# Altium PCB PCB1.PcbDoc
Units mm, origin at the board's own origin, x right, y up, seen from the top; angles counter-clockwise.
Board outline 65.43 x 45.42 mm, 2 copper layers (Top Layer, Bottom Layer); 35 components, 40 nets, 114 pads, 24 vias.
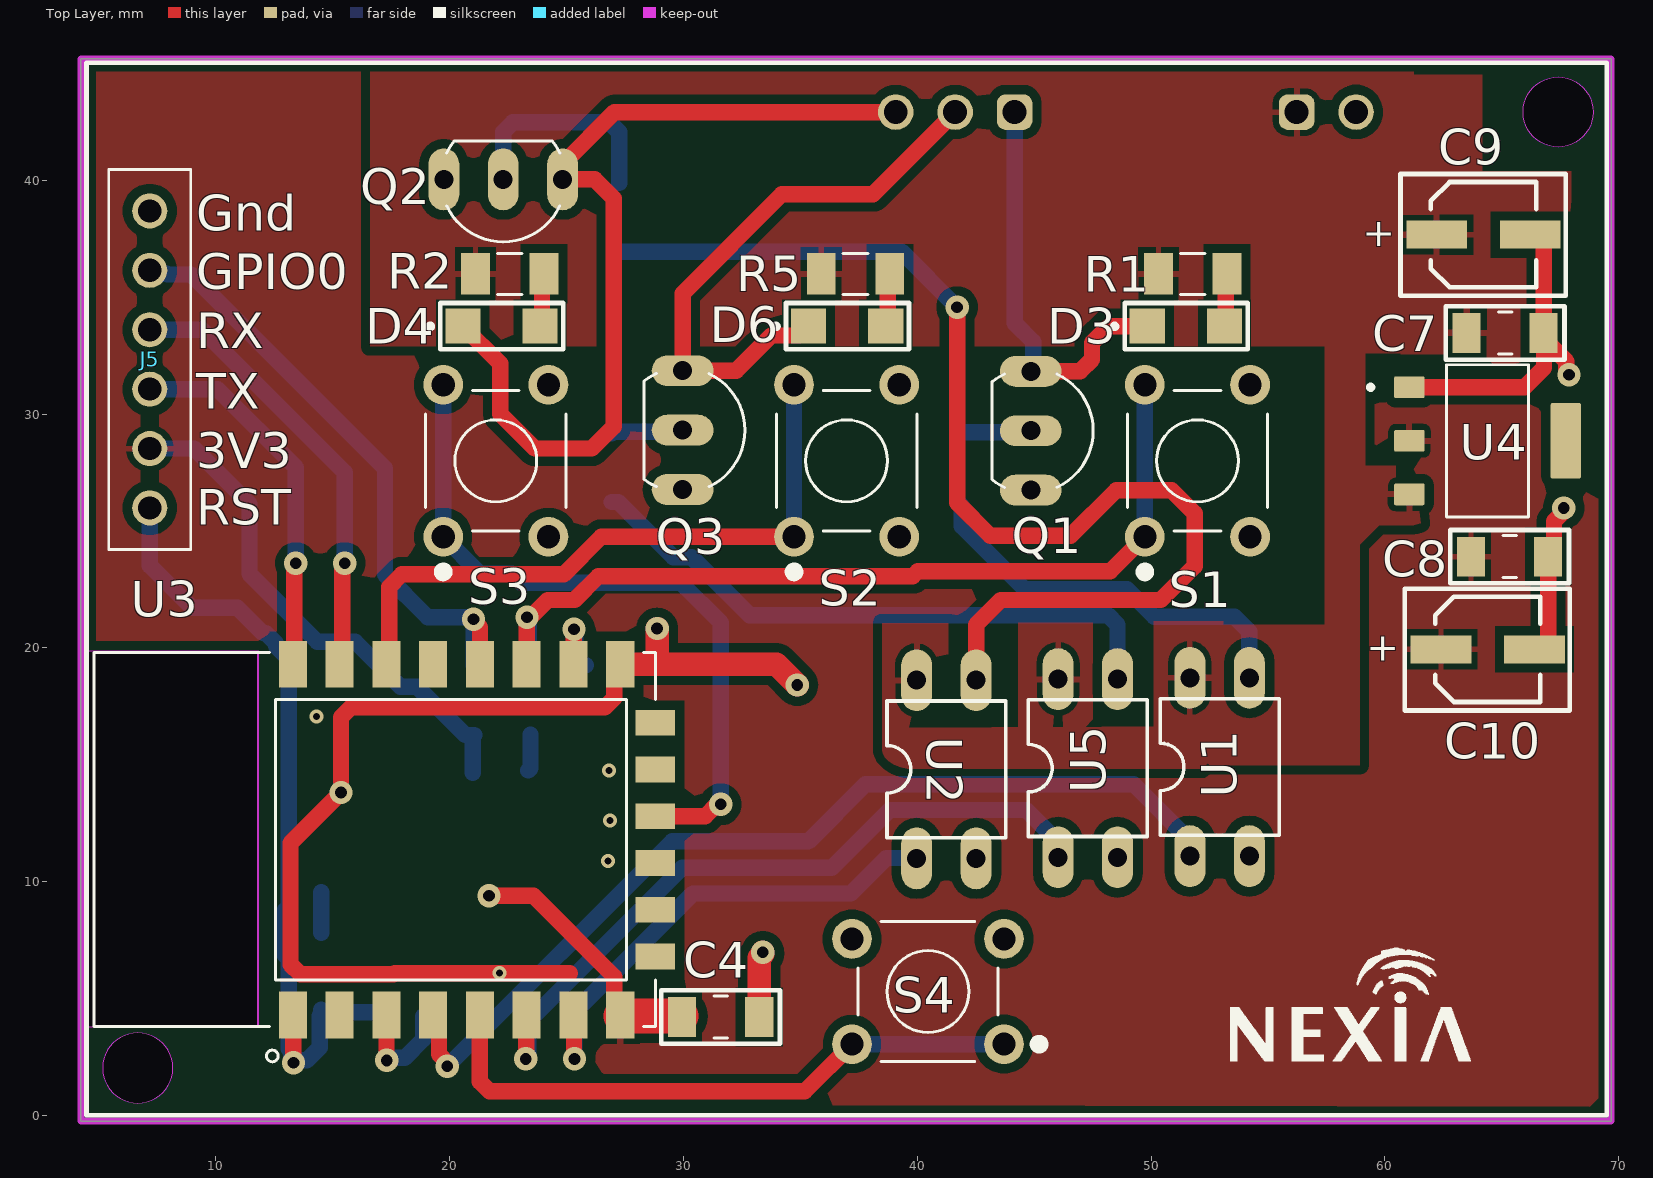
[diagram p0: Top Layer view]
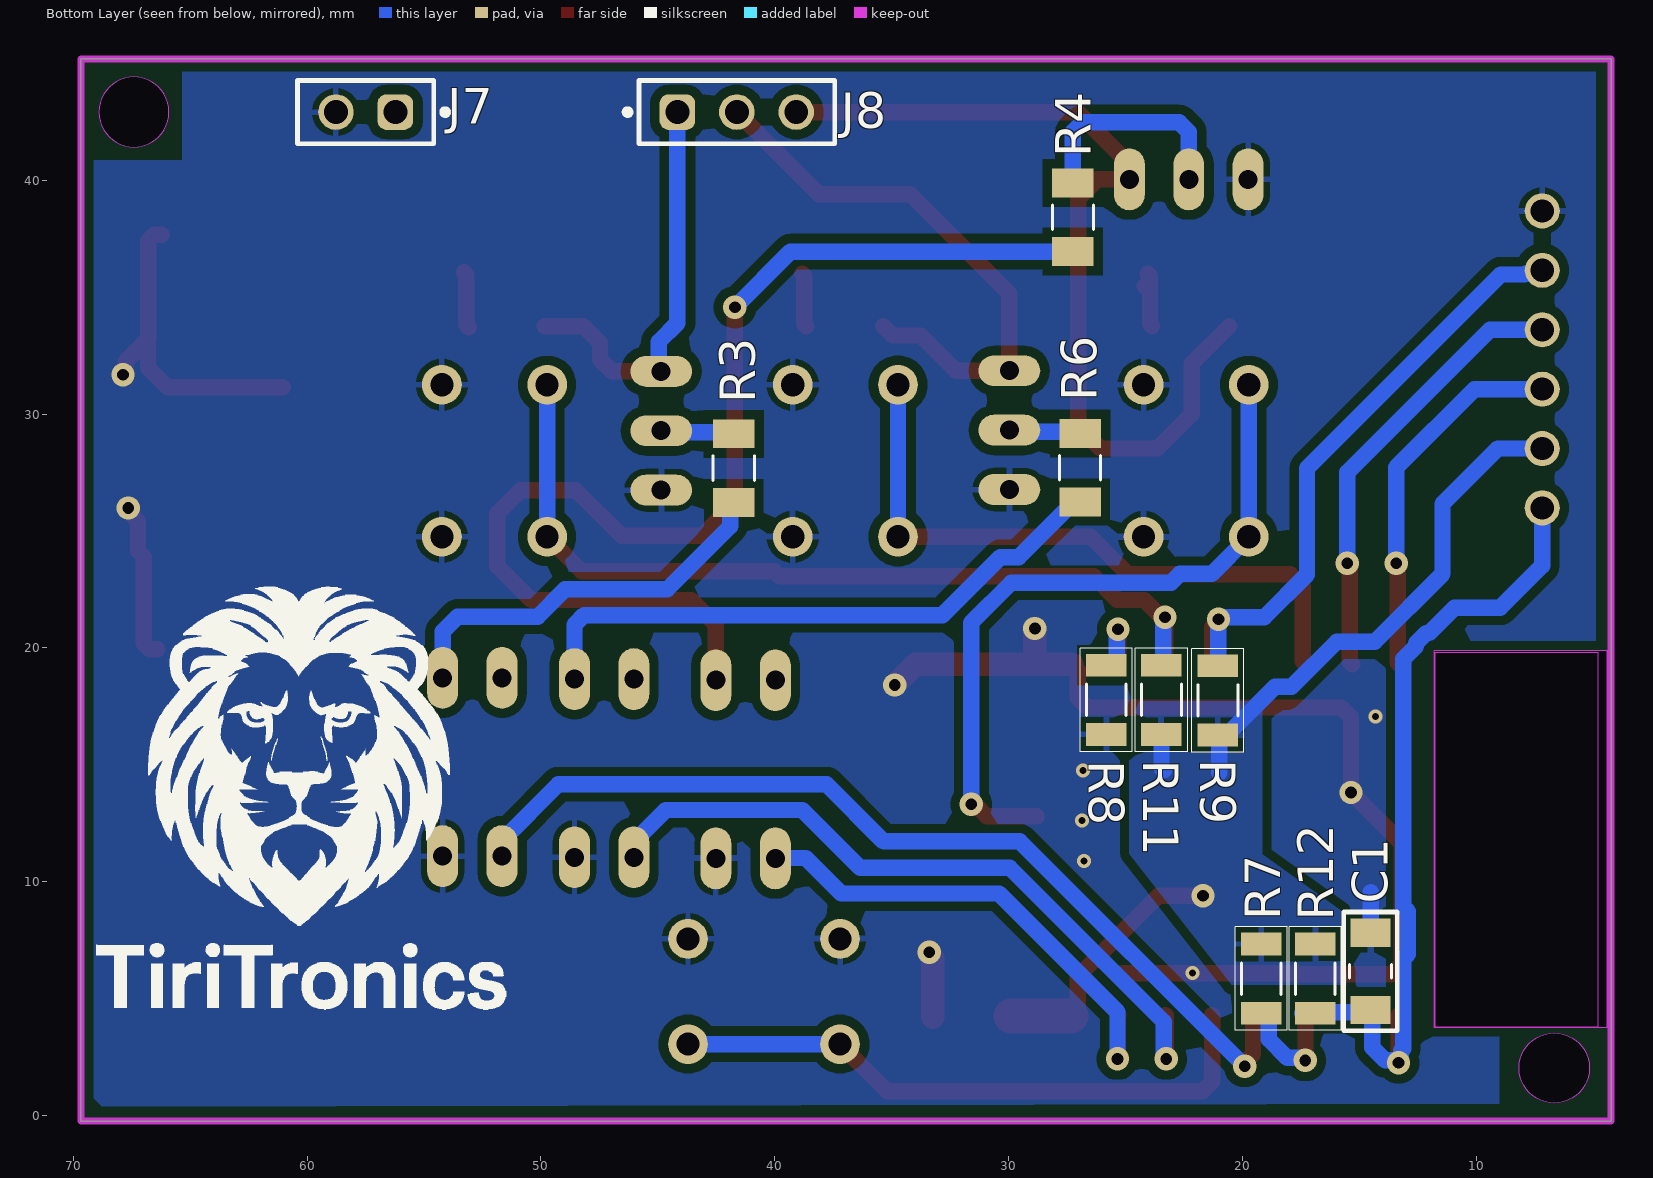
[diagram p1: Bottom Layer view, seen from below]
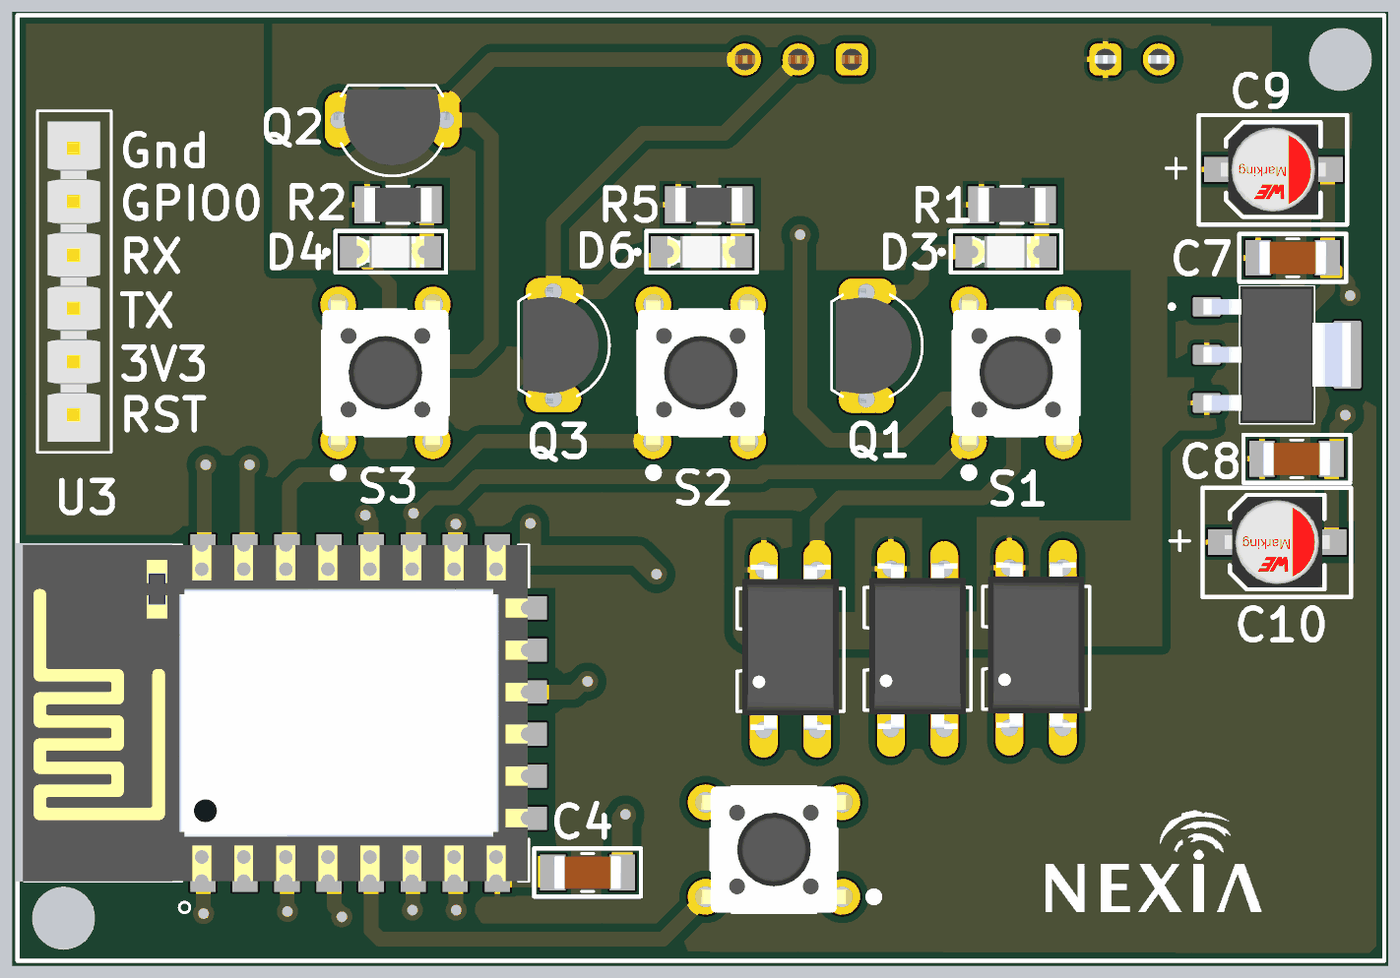
[diagram p2: 3D render of the assembled board from above, using the file's embedded part models]
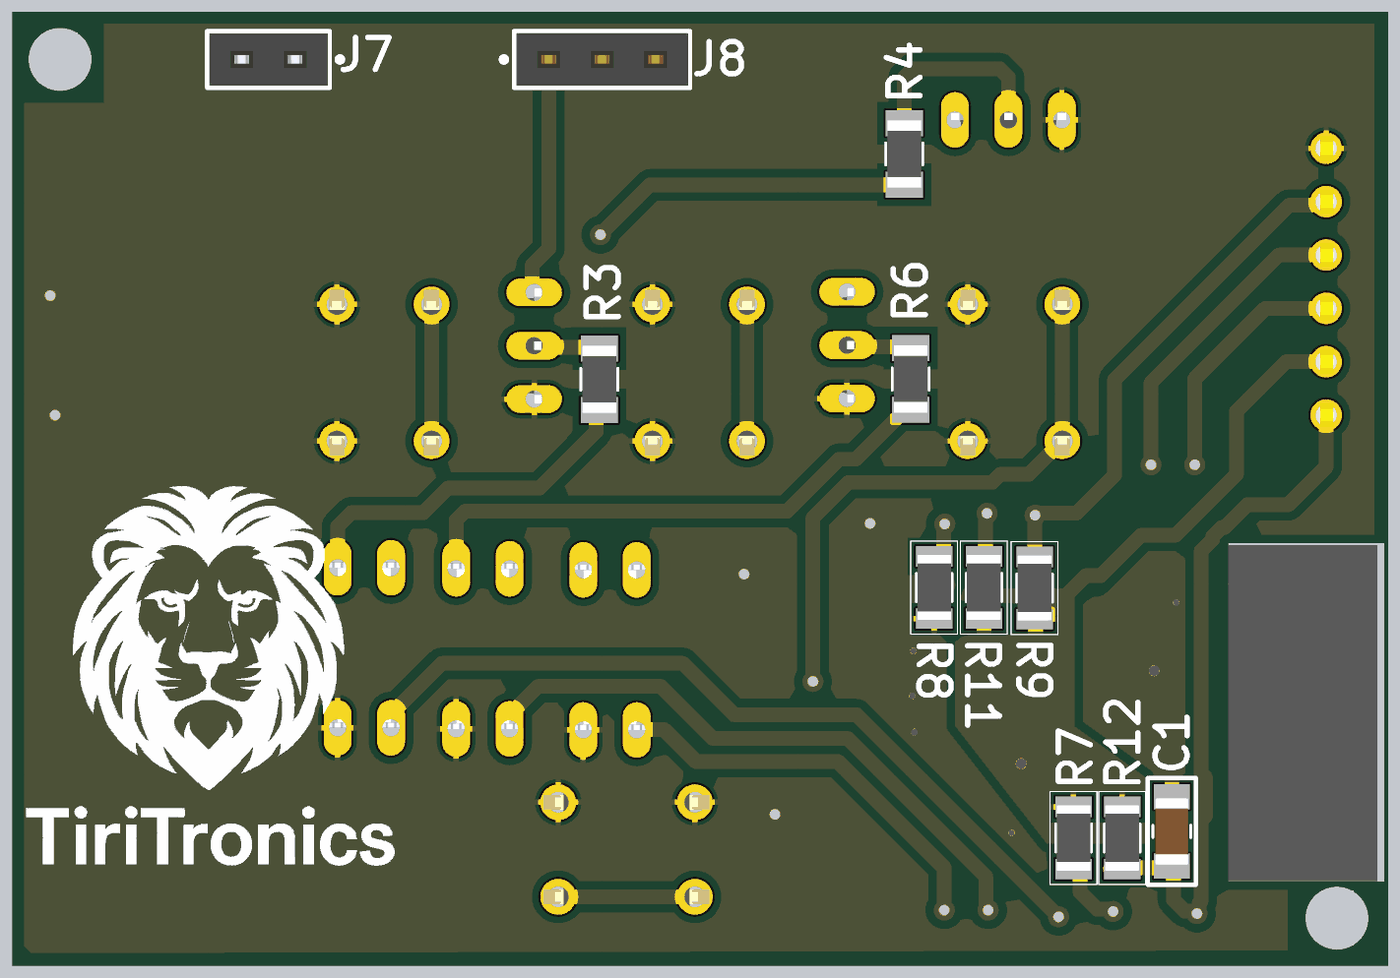
[diagram p3: 3D render of the assembled board from below, using the file's embedded part models]

## Layer stack, top to bottom
Top Solder: solder mask 0.0102, Solder Resist, Dk 3.5
Top Layer: signal copper 0.0356
Dielectric 1: dielectric 0.32, FR-4, Dk 4.8
Bottom Layer: signal copper 0.0356
Bottom Solder: solder mask 0.0102, Solder Resist, Dk 3.5

## Board outline
4.242,-0.229 69.672,-0.229 69.672,45.187 4.242,45.187
cut-out: 67.404,41.412 cw(c67.404,42.912) 65.904,42.912 cw(c67.404,42.912) 67.404,44.412 cw(c67.404,42.912) 68.904,42.912 cw(c67.404,42.912)
cut-out: 5.175,2.041 ccw(c6.675,2.041) 6.675,0.541 ccw(c6.675,2.041) 8.175,2.041 ccw(c6.675,2.041) 6.675,3.541 ccw(c6.675,2.041)
cut-out: 4.42,3.785 4.42,19.888 11.836,19.888 11.836,3.785

## Design rules (kind name [scope] priority, off if disabled: settings)
Clearance [All] p1: gap=0.4 ignorepadtopadclearanceinfootprint=FALSE
PolygonConnect [All] p1: thpad.connectstyle=Relief thpad.reliefconductorwidth=0.254 thpad.reliefentries=4 thpad.polygonreliefangle="90 Angle" thpad.airgapwidth=0.254 smdpad.connectstyle=Relief smdpad.reliefconductorwidth=0.254 smdpad.reliefentries=4 smdpad.polygonreliefangle="90 Angle" smdpad.airgapwidth=0.254 via.connectstyle=Direct via.reliefconductorwidth=0.254 via.reliefentries=4 via.polygonreliefangle="90 Angle" via.airgapwidth=0.254
RoutingVias [All] p1: holewidth=0.711 width=1.27 viastyle="Through Hole" minholewidth=0.711 minwidth=1.27 maxholewidth=0.711 maxwidth=1.27
SilkToSilkClearance [All] p1: silktosilkclearance=0.15
SilkToSolderMaskClearance [IsPad] p1: minsilkscreentomaskgap=0.15 clearancetoexposedcopper=TRUE
SolderMaskExpansion [All] p1: expansion=0.102 istentingtop=FALSE
SupplyNets "Schematic Supply Nets" [InNet('+5')] p1: voltage=0.000
SupplyNets "Schematic Supply Nets_2" [InNet('GND')] p2: voltage=0.000
SupplyNets "Schematic Supply Nets_1" [InNet('3.3V')] p3: voltage=0.000
UnRoutedNet [All] p1: checkbadconnections=TRUE
Width [All] p1: maxlimit=2.5 minlimit=0.5 preferedwidth=0.7
27 further rules are at their usual default settings.

## Components (designator, comment, footprint, x,y, rotation, side; value= is the part's Value field where it differs from the comment)
C1 "100nf" CL31B104KCFNNNE 14.529,6.198 r90 bottom
C4 "100nf" CL31B104KCFNNNE 31.572,4.216 r180 top
C7 "100nf" CL31B104KCFNNNE 65.113,33.469 r180 top
C8 "100nf" CL31B104KCFNNNE 65.303,23.901 r180 top
C9 "22uF" 865060342002 64.213,37.669 r180 top
C10 "22uF" 865060342002 64.396,19.939 r180 top
D3 "CH1" IN-S126ATR 51.486,33.757 r180 top
D4 "CH3" IN-S126ATR 22.226,33.757 r180 top
D6 "CH2" IN-S126ATR 37.008,33.757 r180 top
J5 "Programmer" PHT-106-XX-X-S 7.188,32.309 r90 top
J7 "61300211821" 61300211821 57.495,42.909 r0 bottom
J8 "61300311821" 61300311821 41.625,42.909 r180 bottom
Q1 "BC338" BC338 44.856,29.286 r270 top
Q2 "BC338" BC338 22.301,40.03 r180 top
Q3 "BC338" BC338 29.972,29.312 r270 top
R1 "220R" RMCF1206FT220R 51.783,35.992 r180 top
R2 "220R" RMCF1206FT220R 22.582,35.992 r180 top
R3 "220R" RMCF1206FT220R 41.758,27.686 r90 bottom
R4 "220R" RMCF1206FT220R 27.254,38.412 r90 bottom
R5 "220R" RMCF1206FT220R 37.363,35.992 r180 top
R6 "220R" RMCF1206FT220R 26.949,27.704 r90 bottom
R7 "10K" RC1206FR-0710KL 19.202,5.861 r90 bottom
R8 "10K" RC1206FR-0710KL 25.832,17.78 r270 bottom
R9 "10K" RC1206FR-0710KL 21.057,17.755 r270 bottom
R11 "10K" RC1206FR-0710KL 23.47,17.78 r270 bottom
R12 "10K" RC1206FR-0710KL 16.891,5.861 r90 bottom
S1 "CH1" FSM8JH 51.984,28 r90 top
S2 "CH2" FSM8JH 36.984,28 r90 top
S3 "CH3" FSM8JH 21.984,28 r90 top
S4 "RST" FSM8JH 40.462,5.309 r180 top
U1 "PC817" PC817X2NSZ9F 52.934,14.91 r0 top
U2 "PC817" PC817X2NSZ9F 41.25,14.808 r0 top
U3 "ESP8266" ESP8266-12-F 18.577,9.823 r90 top
U4 "AMS1117-3.3" AMS1117-3.3 64.389,28.677 r0 top
U5 "PC817" PC817X2NSZ9F 47.295,14.859 r0 top

## Footprints (in the part's own frame and the unit in brackets; to place one, negate y for a bottom-side part, rotate by r counter-clockwise, add the part's x,y. Pads: shape width x height; smd on the part's side, far side on the other; paste and mask are expansions set on the pad)
61300211821 [mm] "Socket Header, Pitch 2.54 mm, THT, Vertical, single row, 2p"
  rrect50% 1.52x1.52 hole 1.02: 1(-1.27,0)
  round 1.52 hole 1.02: 2(1.27,0)
  silkscreen extent -3.52,-1.35 2.92,1.35, body extent -2.79,-1.25 2.79,1.25, height 8.55
61300311821 [mm] "Socket Header, Pitch 2.54 mm, THT, Vertical, single row, 3p"
  rrect50% 1.52x1.52 hole 1.02: 1(-2.54,0)
  round 1.52 hole 1.02: 2(0,0) 3(2.54,0)
  silkscreen extent -4.8,-1.35 4.19,1.35, body extent -4.06,-1.25 4.06,1.25, height 8.55
865060342002 [mm]
  rect 2.6x1.2 smd: 1(2,0) 2(-2,0)
  silkscreen extent -3.51,-2.59 3.55,2.62, body extent -2.5,-2.15 2.5,2.15, height 5.5
AMS1117-3.3 [mm]
  rrect15% 1.31x0.93 smd: 1(-3.345,2.468) 2(-3.345,0.178) 3(-3.345,-2.112)
  rrect15% 1.31x3.24 smd: 4(3.345,0.178)
  silkscreen extent -5.1,-3.07 1.75,3.43, body extent -3.5,-3.07 3.5,3.43, height 1.8
BC338 [mil]
  oval 52x104 hole 32: B(0,0) C(-100,0) E(100,0)
  silkscreen extent -95,-65 95,105, body extent -108,-57 108,85, height 318
CL31B104KCFNNNE [mm]
  rect 1.2x1.7 smd: 1(-1.675,0) 2(1.625,0)
  silkscreen extent -2.57,-1.14 2.51,1.14, body extent -1.63,-0.8 1.57,0.8, height 1.4
ESP8266-12-F [mm]
  rect 2x1.2 smd: 1(-5.519,5.273) 2(-5.519,3.273) 3(-5.519,1.273) 4(-5.519,-0.727) 5(-5.519,-2.727) 6(-5.519,-4.727) 7(-5.519,-6.727) 8(-5.519,-8.727) 15(9.481,-8.727) 16(9.481,-6.727) 17(9.481,-4.727) 18(9.481,-2.727) 19(9.481,-0.727) 20(9.481,1.273) 21(9.481,3.273) 22(9.481,5.273)
  rect 1.1x1.7 smd: 9(-3.019,-10.227) 10(-1.019,-10.227) 11(0.981,-10.227) 12(2.981,-10.227) 13(4.981,-10.227) 14(6.981,-10.227)
  Keep-Out Layer region: 9.981,6.782 -6.028,6.782 -6.028,13.773 9.981,13.773
  Keep-Out Layer region: 9.981,6.782 -6.028,6.782 -6.028,13.773 9.981,13.773
  silkscreen extent -7.52,-10.23 9.98,13.77, body extent -6.02,-10.17 9.98,13.83, height 3
FSM8JH [mm]
  round 1.7 hole 0.99: 1(-3.25,2.25) 2(-3.25,-2.25) 3(3.25,2.25) 4(3.25,-2.25)
  silkscreen extent -4.95,-3 3,3, body extent -3.95,-3 3.95,3, height 9.55
IN-S126ATR [mm]
  rect 1.5x1.5 smd: 1(1.65,0) 2(-1.65,0)
  silkscreen extent -2.64,-0.99 3.12,0.99, body extent -1.6,-0.75 1.6,0.75, height 1.11
PC817X2NSZ9F [mil]
  oval 52x104 hole 32: 1(-50,-150) 2(50,-150) 3(50,150) 4(-50,150)
  silkscreen extent -100,-115 100,115, body extent -91,-150 91,160, height 179
PHT-106-XX-X-S [mil]
  round 59 hole 39: 1(-249,0) 2(-149,0) 3(-49,0) 4(51,0) 5(151,0) 6(251,0)
  silkscreen extent -319,-69 321,69, body extent -299,-48 301,50, height 330
RC1206FR-0710KL [mm]
  rect 0.97x1.73 smd: 1(-1.48,0) 2(1.48,0)
  silkscreen extent -2.21,-1.11 2.21,1.11, body extent -1.55,-0.8 1.55,0.8, height 0.65
RMCF1206FT220R [mm]
  rect 1.23x1.77 smd: 1(-1.466,0) 2(1.466,0)
  silkscreen extent -0.53,-0.88 0.53,0.88, body extent -1.6,-0.8 1.6,0.8, height 0.68

## Part data
C1 C4 C7 C8: library part CL31B104KCFNNNE, "0.1 µF ±10% 100V Ceramic Capacitor X7R 1206 (3216 Metric)", ComponentLink1Description=Link, ComponentLink1URL=https://www.digikey.com/en/products/detail/samsung-electro-mechanics/CL31B104KCFNNNE/3886809, P/N=1276-1151-6-ND
C9 C10: library part 865060342002, "22 µF 16 V Aluminum Electrolytic Capacitors Radial, Can - SMD 2000 Hrs @ 105°C", ComponentLink1Description=Link, ComponentLink1URL=https://www.digikey.com/en/products/detail/w%C3%BCrth-elektronik/865060342002/5728114, P/N=732-8519-6-ND
D3 D4 D6: library part IN-S126ATR, "Red 622nm LED Indication - Discrete 2V 1206 (3216 Metric)", ComponentLink1Description=Link, ComponentLink1URL=https://makerselectronics.com/product/smd-led-red-1206
J5: library part PHT-106-XX-X-S, "6 pin male pin header"
J7: "WR-PHD Socket Header, THT, Vertical, pitch 2.54mm, 1 Row, 2P", Contact Resistance=20mOhm, Manufacturer="Wurth Elektronik", Operating Temperature Max=125°C, Operating Temperature Min=-40°C, Rated Current=3A, Withstanding Voltage=500V, Working Voltage=250V, Category="Board-to-Board Connectors", ComponentLink1Description="Website Link", ComponentLink1URL=https://www.we-online.com/redexpert/article/61300211821?ad, ComponentLink2Description="Datasheet Link", ComponentLink2URL=https://www.we-online.com/redexpert/spec/61300211821?ad, Gender="Socket Header", Manufacturer Part Number=61300211821, Match Code=WR-PHD, Mount="Through Hole", Number of Pins=2, Number of Rows=1, Orientation=Vertical, Packaging=Tray, Pitch=2.54mm
J8: "WR-PHD Socket Header, THT, Vertical, pitch 2.54mm, 1 Row, 3P", Contact Resistance=20mOhm, Manufacturer="Wurth Elektronik", Operating Temperature Max=125°C, Operating Temperature Min=-40°C, Rated Current=3A, Withstanding Voltage=500V, Working Voltage=250V, Category="Board-to-Board Connectors", ComponentLink1Description="Website Link", ComponentLink1URL=https://www.we-online.com/redexpert/article/61300311821?ad, ComponentLink2Description="Datasheet Link", ComponentLink2URL=https://www.we-online.com/redexpert/spec/61300311821?ad, Gender="Socket Header", Manufacturer Part Number=61300311821, Match Code=WR-PHD, Mount="Through Hole", Number of Pins=3, Number of Rows=1, Orientation=Vertical, Packaging=Tray, Pitch=2.54mm
Q1 Q2 Q3: "Bipolar (BJT) Transistor NPN 25 V 800 mA 100MHz 625 mW Through Hole TO-92-3", ComponentLink1Description=Link, ComponentLink1URL=https://www.digikey.com/en/products/detail/onsemi/BC338/978413, P/N=BC338-ND
R1 R2 R3 R4 R5 R6: library part RMCF1206FT220R, "220 Ohms ±1% 0.25W, 1/4W Chip Resistor 1206 (3216 Metric) Automotive AEC-Q200 Thick Film", ComponentLink1Description=link, ComponentLink1URL=https://www.digikey.com/en/products/detail/stackpole-electronics-inc/RMCF1206FT220R/1759830, P/N=RMCF1206FT220RDKR-ND
R7 R8 R9 R11 R12: library part RC1206FR-0710KL, "10 kOhms ±1% 0.25W, 1/4W Chip Resistor 1206 (3216 Metric) Moisture Resistant Thick Film", ComponentLink1Description="Digikey link", ComponentLink1URL=https://www.digikey.com/en/products/detail/yageo/RC1206FR-0710KL/728483, ComponentLink2Description="Makers link", ComponentLink2URL=https://makerselectronics.com/product/chip-resistor-smd-10k%cf%89-%c2%b11-250mw-1206, P/N=311-10.0KFRDKR-ND
S1 S2 S3 S4: library part FSM8JH, "Tactile Switch SPST-NO Top Actuated Through Hole", ComponentLink1Description=Link, ComponentLink1URL=https://makerselectronics.com/product/mini-push-button-switch-4-pin-6x6x5mm
U1 U2 U5: library part PC817X2NSZ9F, "Optoisolator Transistor Output 5000Vrms 1 Channel 4-DIP", ComponentLink1Description=Link, ComponentLink1URL=https://www.digikey.com/en/products/detail/sharp-socle-technology/PC817X2NSZ9F/7942022, P/N=PC817X2NSZ9F-ND
U3: library part ESP8266-12-F, "This WiFi module has a 32-bit MCU micro and clock speeds supporting 80 MHz or 160 MHz. Supports the RTOS and integrated Wi-Fi MAC/BB/RF/PA/LNA, and has an on-board antenna.", ComponentLink1Description=Link, ComponentLink1URL=https://makerselectronics.com/product/wifi-esp8266-12-f-module
U4: "Sot223/Pkg 1-Amp 3.3-Volt Low Drop Out Voltage Regulatator", ComponentLink1Description=Link, ComponentLink1URL=https://makerselectronics.com/product/ams1117-3-3v-smd-fixed-12v-3-3v-800ma-sot-223-dropout-regulators

## Via types
v1: diameter 1/1 (per signal layer), hole 0.5, Top Layer to Bottom Layer, tented both sides, 18 vias
v2: diameter 0.6, hole 0.3, Top Layer to Bottom Layer, tented both sides, 5 vias
v3: diameter 1, hole 0.5, Top Layer to Bottom Layer, tented both sides, 1 vias

## Nets (pads, with @x,y where several pads share a name; then routed paths per layer and width w, separated by ;. In a path a pad name is that pad's centre, name@x,y a point inside that pad or via, vN(x,y) a via of type N, cw(c..) or ccw(c..) an arc to the next point about the centre after c; other vN are vias at no path point)
3.3V: C4.2 C8.2 C10.1 J5.2 R7.2 R9.2 R11.2 R12.2 U3.8 U4.2 | length 35
  Top Layer w0.7: v3(21.692,9.398) 23.597,9.398 27.054,5.941 27.054,4.554 U3.8
  Top Layer w1.5: U3.8@27.348,4.26 C4.2@29.904,4.26
  Bottom Layer w0.7: J5.2 9.093,28.524 11.455,26.162 11.455,23.165 14.351,20.269 15.977,20.269 17.907,18.339 18.612,18.339 20.677,16.275 R9.2 21.006,16.224 21.006,14.656 ; 23.368,14.757 23.47,14.859 R11.2
+5: C7.2 C9.1 J7.1 R1.2 R2.2 R5.2 U1.4 U2.4 U4.3 U5.4
CH1: U1.1 U3.4 | length 40.9
  Top Layer w0.7: U3.4 19.554,4.054 19.554,2.622 19.914,2.262 v1(19.914,2.108)
  Bottom Layer w0.7: v1(19.914,2.108) 29.532,11.727 35.349,11.727 37.791,14.169 49.255,14.169 51.664,11.76 U1.1
CH1_P_FEMALE: D3.1 J8.1 Q1.C | length 17.6
  Top Layer w0.7: Q1.C@44.958,31.928 Q1.C 46.965,31.826 47.473,32.334 47.473,33.045 48.184,33.757 D3.1
  Bottom Layer w0.7: J8.1 44.165,33.889 44.958,33.096 Q1.C@44.958,31.928
CH1_P_MALE: 
CH2: U3.6 U5.1 | length 31.1
  Top Layer w0.7: v1(23.266,2.426) 23.285,2.445 23.285,4.285 U3.6
  Bottom Layer w0.7: v1(23.266,2.426) 23.375,2.535 23.375,4.014 29.961,10.6 36.355,10.6 38.825,13.069 44.665,13.069 46.025,11.709 U5.1
CH2_P_FEMALE: D6.1 J8.2 Q3.C | length 24.3
  Top Layer w0.7: D6.1 34.958,33.357 33.763,33.357 32.258,31.852 Q3.C 29.972,35.154 34.214,39.395 38.111,39.395 J8.2
CH2_P_MALE: 
CH3: U2.1 U3.7 | length 21.3
  Top Layer w0.7: U3.7 25.327,4.281 25.327,2.449 v1(25.349,2.426)
  Bottom Layer w0.7: v1(25.349,2.426) 25.349,4.433 30.416,9.5 37.16,9.5 38.679,11.019 39.959,11.019 U2.1
CH3_P_FEMALE: D4.1 J8.3 Q2.C | length 38.4
  Top Layer w0.7: D4.1 22.174,32.158 22.174,29.997 23.647,28.524 26.086,28.524 27.026,29.464 27.026,39.218 26.213,40.03 Q2.C 24.841,40.691 27.059,42.909 J8.3
CH3_P_MALE: 
EN: R7.1 U3.3 | length 5.2
  Top Layer w0.7: v1@17.313,2.372 U3.3@17.313,4.295
  Bottom Layer w0.7: v1(17.323,2.362) 17.432,2.471 18.092,2.471 18.885,3.264 18.885,4.246 19.02,4.381 R7.1
GND: C1.2 C4.1 C7.1 C8.1 C9.2 C10.2 J5.6 J7.2 Q1.E Q2.E Q3.E R8.2 S1.2 S1.4 S2.2 S2.4 S3.2 S3.4 S4.2 S4.4 U1.2 U2.2 U3.15 U4.1 U5.2 | length 71.7
  Top Layer w0.7: v1(15.367,13.818) 13.208,11.659 13.208,6.464 13.618,6.054 17.615,6.054 17.657,6.096 v2(22.149,6.096) 25.147,6.096 ; v1@15.367,14.307 15.367,17.04 15.777,17.45 26.644,17.45 27.054,17.86 27.054,19.054 U3.15 ; U4.1 65.968,31.144 66.802,31.979 C7.1@66.802,33.205 ; C9.2 66.538,37.669 66.788,37.419 C7.1 66.788,33.219 C7.1@66.802,33.205 ; C10.2 66.729,19.939 66.979,20.189 C8.1 67.229,24.151 67.229,25.419 67.64,25.83 v1(67.64,25.984) ; v1(67.869,31.674) 67.76,31.783 67.76,32.247 C7.1@66.802,33.205
  Top Layer w1: U3.15 28.88,19.304 ; v1(28.88,20.828) 28.88,19.304 ; C4.1 33.248,6.759 33.401,6.912 v1(33.401,6.985) ; v1(34.874,18.415) 33.985,19.304 28.88,19.304
  Bottom Layer w0.7: J5.6@7.175,38.672 J5.6 ; C1.2 14.529,9.55
  other v2: 26.772,10.897 26.873,12.624 26.822,14.757 14.326,17.069
GPIO0: J5.5 R9.1 U3.18 | length 26.8
  Top Layer w0.7: v1(21.031,21.221) 21.031,21.156 21.311,20.877 21.311,19.311 U3.18
  Bottom Layer w0.7: J5.5 7.341,35.991 7.906,35.991 7.931,35.966 8.966,35.966 17.247,27.686 17.247,23.139 19.075,21.311 20.942,21.311 v1(21.031,21.221) ; v1@21.044,21.298 21.044,19.247 R9.1
GPIO2: R11.1 S1.1 S1.3 U3.17 | length 38.5
  Top Layer w0.7: U3.17 23.311,19.311 23.311,21.304 v1(23.317,21.311) 23.471,21.311 24.211,22.05 25.352,22.05 26.366,23.063 39.81,23.063 40.021,23.274 48.258,23.274 S1.1
  Bottom Layer w0.7: v1(23.317,21.311) 23.393,21.234 23.393,19.336 R11.1 ; S1.1 S1.3
GPIO4: U3.19
GPIO5: S2.1 S2.3 U3.20 | length 28
  Top Layer w0.7: U3.20 17.424,19.424 17.424,22.606 17.968,23.15 24.897,23.15 26.497,24.75 S2.1
  Bottom Layer w0.7: S2.1 S2.3
GPIO10: S3.1 S3.3 U3.12 | length 30.7
  Top Layer w0.7: U3.12 30.938,12.804 31.443,13.31 v1(31.598,13.31)
  Bottom Layer w0.7: S3.3 S3.1 21.319,23.165 22.682,23.165 23.063,22.784 29.896,22.784 31.598,21.082 v1(31.598,13.31)
GPIO14: S4.1 S4.3 U3.5 | length 26.3
  Top Layer w0.7: U3.5 21.304,1.451 21.714,1.041 35.195,1.041 S4.3
  Bottom Layer w0.7: S4.3 S4.1
GPIO15: R8.1 U3.16 | length 3.4
  Top Layer w0.7: U3.16 25.315,19.315 25.315,20.789 v1(25.327,20.8)
  Bottom Layer w0.7: v1(25.327,20.8) 25.384,20.743 25.384,19.395 25.519,19.26 R8.1
NetD3_2: D3.2 R1.1 | length 2.4
  Top Layer w0.7: D3.2@53.094,33.715 D3.2 53.193,33.813 53.193,35.935 R1.1 ; R1.1@53.249,36.017 R1.1@53.291,36.059
NetD4_2: D4.2 R2.1 | length 2.5
  Top Layer w0.7: D4.2 23.962,33.842 23.962,35.906 R2.1 ; R2.1@24.048,35.611 R2.1@24.19,35.469
NetD6_2: D6.2 R5.1 | length 2.3
  Top Layer w0.7: D6.2 38.744,33.842 38.744,35.906 R5.1
NetJ1_1: 
NetJ1_2: 
NetJ2_1: 
NetJ2_2: 
NetJ3_1: 
NetJ3_2: 
NetJ4_1: 
NetJ4_2: 
NetQ1_B: Q1.B R3.2 | length 3.2
  Bottom Layer w0.7: R3.2 41.825,29.219 44.789,29.219 Q1.B
NetQ2_B: Q2.B R4.2 | length 9.5
  Bottom Layer w0.7: Q2.B 22.301,42.059 22.711,42.469 26.844,42.469 27.254,42.059 R4.2
NetQ3_B: Q3.B R6.2 | length 3.1
  Bottom Layer w0.7: R6.2 27.02,29.241 29.901,29.241 Q3.B
NetR3_1: R3.1 U1.3 | length 17.2
  Bottom Layer w0.7: R3.1 41.91,26.068 41.91,25.197 44.602,22.504 48.971,22.504 50.14,21.336 53.569,21.336 54.204,20.701 U1.3
NetR4_1: R4.1 U2.3 | length 50.8
  Top Layer w0.7: v1(41.707,34.569) 41.707,26.213 43.129,24.79 46.558,24.79 48.514,26.746 50.876,26.746 51.861,25.761 51.861,23.489 50.419,22.047 43.578,22.047 42.52,20.989 U2.3
  Bottom Layer w0.7: R4.1 39.33,36.946 v1(41.707,34.569)
NetR6_1: R6.1 U5.3 | length 26.1
  Bottom Layer w0.7: R6.1 27.219,26.238 29.574,23.884 30.351,23.884 32.831,21.404 48.155,21.404 48.565,20.994 U5.3
RST: C1.1 J5.1 R12.1 U3.1 | length 35.2
  Top Layer w0.7: v1@13.32,2.276 U3.1@13.32,4.288
  Bottom Layer w0.7: J5.1 7.188,23.52 8.992,21.717 10.942,21.717 12.021,20.638 12.147,20.638 12.586,20.199 12.586,20.073 13.132,19.527 13.132,8.936 12.929,8.733 12.929,6.912 13.132,6.709 13.132,2.867 13.226,2.773 13.226,2.37 v1(13.335,2.261) 13.378,2.303 13.444,2.37 13.907,2.37 14.453,2.915 14.453,4.272 14.529,4.348 C1.1 ; C1.1@15.011,4.471 15.053,4.429 17.408,4.429 R12.1@17.45,4.387
RX: J5.4 U3.21 | length 19.1
  Top Layer w0.7: U3.21 15.412,19.412 15.412,23.514 v1(15.519,23.622)
  Bottom Layer w0.7: J5.4 9.423,33.604 15.519,27.508 v1(15.519,23.622)
TX: J5.3 U3.22 | length 16.1
  Top Layer w0.7: U3.22 13.37,19.37 13.37,23.556 v1(13.437,23.622)
  Bottom Layer w0.7: J5.3 10.084,31.064 13.437,27.711 v1(13.437,23.622)
pads on no net: U3.2 U3.9 U3.10 U3.11 U3.13 U3.14 U4.4

## Polygon pours and split planes (outlines as drawn)
GND on Bottom Layer "GND_L02_P018" (solid, remove dead copper, pour order 18): 9.017,0.508 9.017,4.445 4.902,4.445 4.902,44.653 4.928,44.628 65.329,44.628 65.329,40.792 65.38,40.843 69.139,40.843 69.139,0.406 69.113,0.381
3.3V on Bottom Layer "3.3V_L02_P016" (solid, pour order 16): 19.152,17.729 24.841,17.729 24.841,11.197 20.472,5.588 15.57,5.588 15.57,8.604 19.152,11.171
3.3V on Top Layer "3.3V_L01_P022" (solid, remove dead copper, pour order 22): 9.017,0.508 9.017,4.445 4.902,4.445 4.902,44.653 4.928,44.628 65.329,44.628 65.329,40.792 65.38,40.843 69.139,40.843 69.139,0.406 69.113,0.381
+5 on Top Layer "+5_L01_P015" (solid, remove dead copper, pour order 15): 16.612,44.628 16.612,32.893 61.239,32.893 61.239,44.628
+5 on Top Layer "+5_L01_P007" (solid, remove dead copper, pour order 7): 53.086,16.535 53.086,21.133 50.114,21.133 50.114,16.535
+5 on Top Layer "+5_L01_P008" (solid, remove dead copper, pour order 8): 47.498,16.942 47.498,21.082 44.323,21.082 44.323,16.612 47.523,16.612
+5 on Top Layer "+5_L01_P009" (solid, remove dead copper, pour order 9): 41.326,16.586 41.326,21.057 38.506,21.057 38.506,16.586
+5 on Top Layer "+5_L01_P010" (solid, pour order 10): 38.506,16.586 38.506,15.695 ccw(c39.113,15.695) 38.684,15.265 ccw(c39.727,16.308) 39.727,14.834 52.172,14.834 52.19,14.852 ccw(c50.614,16.754) 53.082,16.663
+5 on Top Layer "+5_L01_P011" (solid, remove dead copper, pour order 11): 54.407,44.552 54.381,44.552 54.381,44.501 64.16,44.501 64.16,40.386 67.97,40.386 67.97,32.055 62.535,32.055 62.535,35.052 60.681,35.052 60.681,41.173 54.381,41.173
+5 on Top Layer "+5_L01_P012" (solid, pour order 12): 60.681,35.052 60.681,32.563 64.342,32.563 64.342,35.032 62.713,35.032 62.687,35.032 62.535,35.032
+5 on Top Layer "+5_L01_P013" (solid, remove dead copper, pour order 13): 51.994,14.834 52.146,14.986 58.928,14.986 58.928,24.409 59.766,25.248 61.074,25.248 ccw(c61.074,27.242) 62.484,25.832 cw(c62.607,25.954) 62.433,25.954 62.433,27.61 ccw(c62.004,27.181) 62.004,27.788 59.157,27.788 59.157,32.588 63.881,32.588 63.881,36.525 57.429,36.525 57.429,20.98 52.807,20.98 52.807,20.955 52.197,20.955

## Keep-outs
Keep-Out Layer:
  the board outline again, w0.3

## Silkscreen, mask and mechanical layers (free items; w line width, h text height)
Top Overlay:
  drawing of 14 lines, arcs and shapes, not listed
  text "Gnd" at 9.169,37.846 h1.52
  text "GPIO0" at 9.169,35.331 h1.52
  text "RX" at 9.169,32.817 h1.52
  text "TX" at 9.169,30.226 h1.52
  text "3V3" at 9.169,27.686 h1.52
  text "RST" at 9.169,25.273 h1.52
Bottom Overlay:
  drawing of 24 lines, arcs and shapes, not listed
Mechanical 1:
  lines w0.254: 4.42,3.785 4.42,19.888 4.47,19.888 11.836,19.888 11.836,3.785 4.42,3.785

## Text inside footprints (layer, text, board x,y; h text height)
C9: Top Overlay "+" at 60.435,38.202 h1.22 r180
C10: Top Overlay "+" at 60.618,20.472 h1.22 r180